# Altium PCB eye.PcbDoc
Units mm, origin at the board's own origin, x right, y up, seen from the top; angles counter-clockwise.
Board outline 25 x 25 mm, 2 copper layers (Top Layer, Bottom Layer), stack 0.871 mm thick; 11 components, 13 nets, 50 pads, 76 vias.
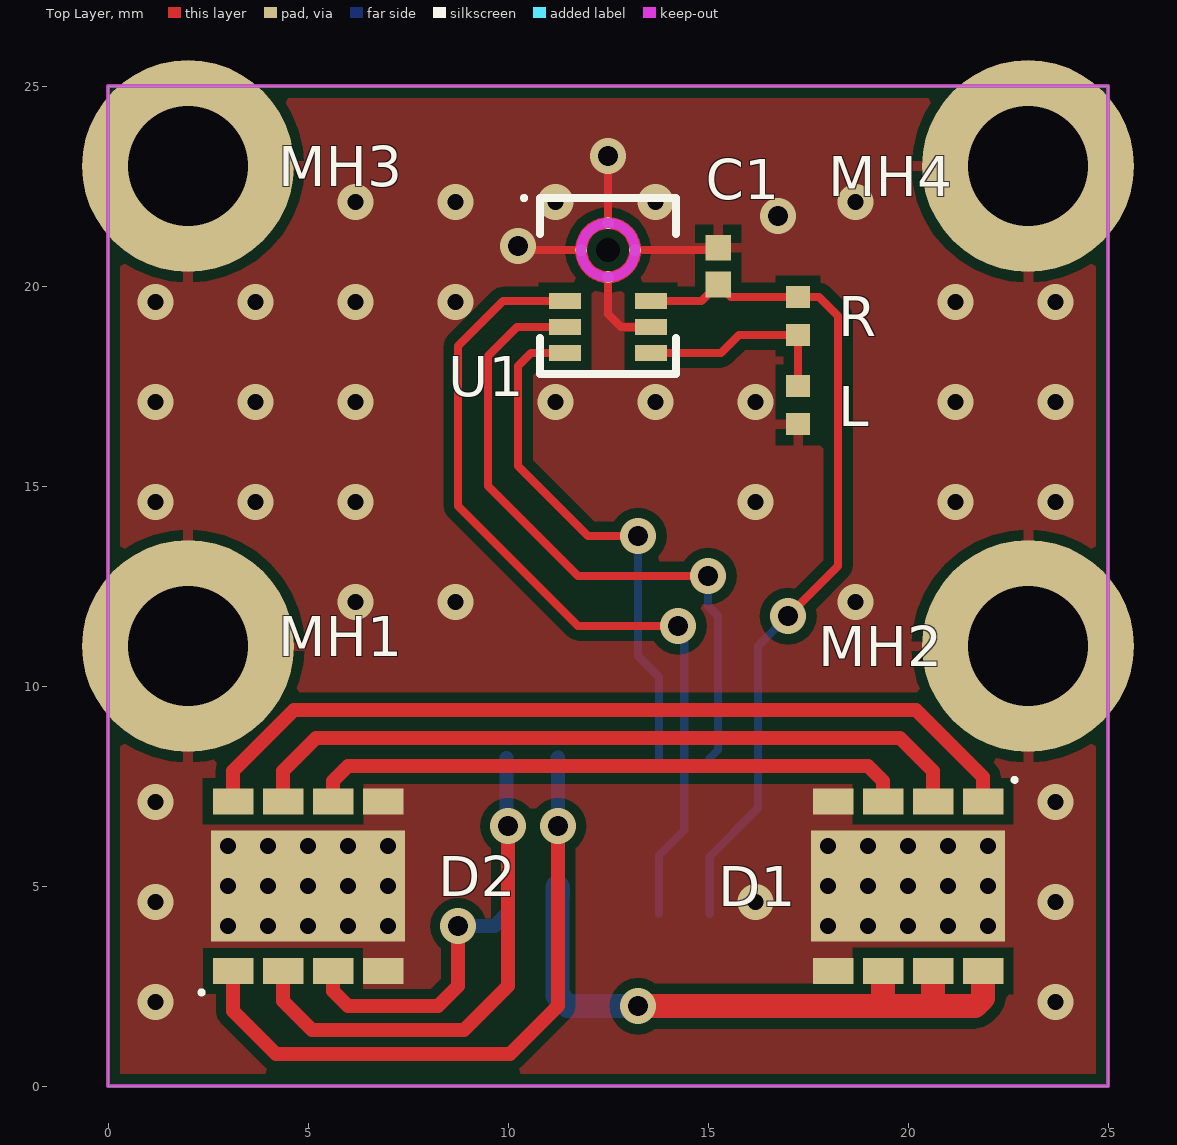
[diagram p0: Top Layer view]
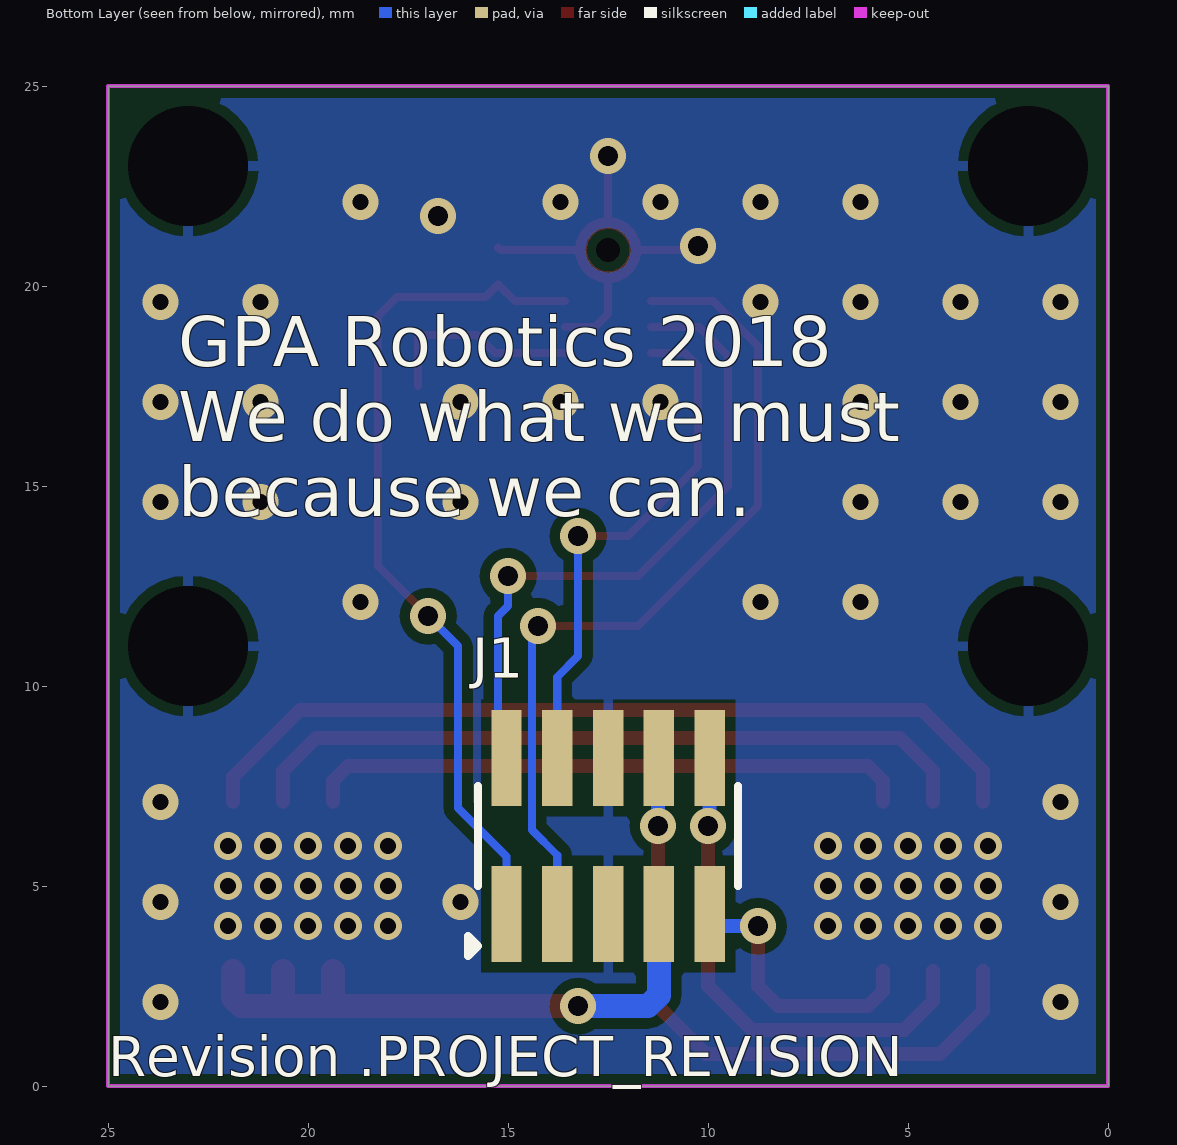
[diagram p1: Bottom Layer view, seen from below]
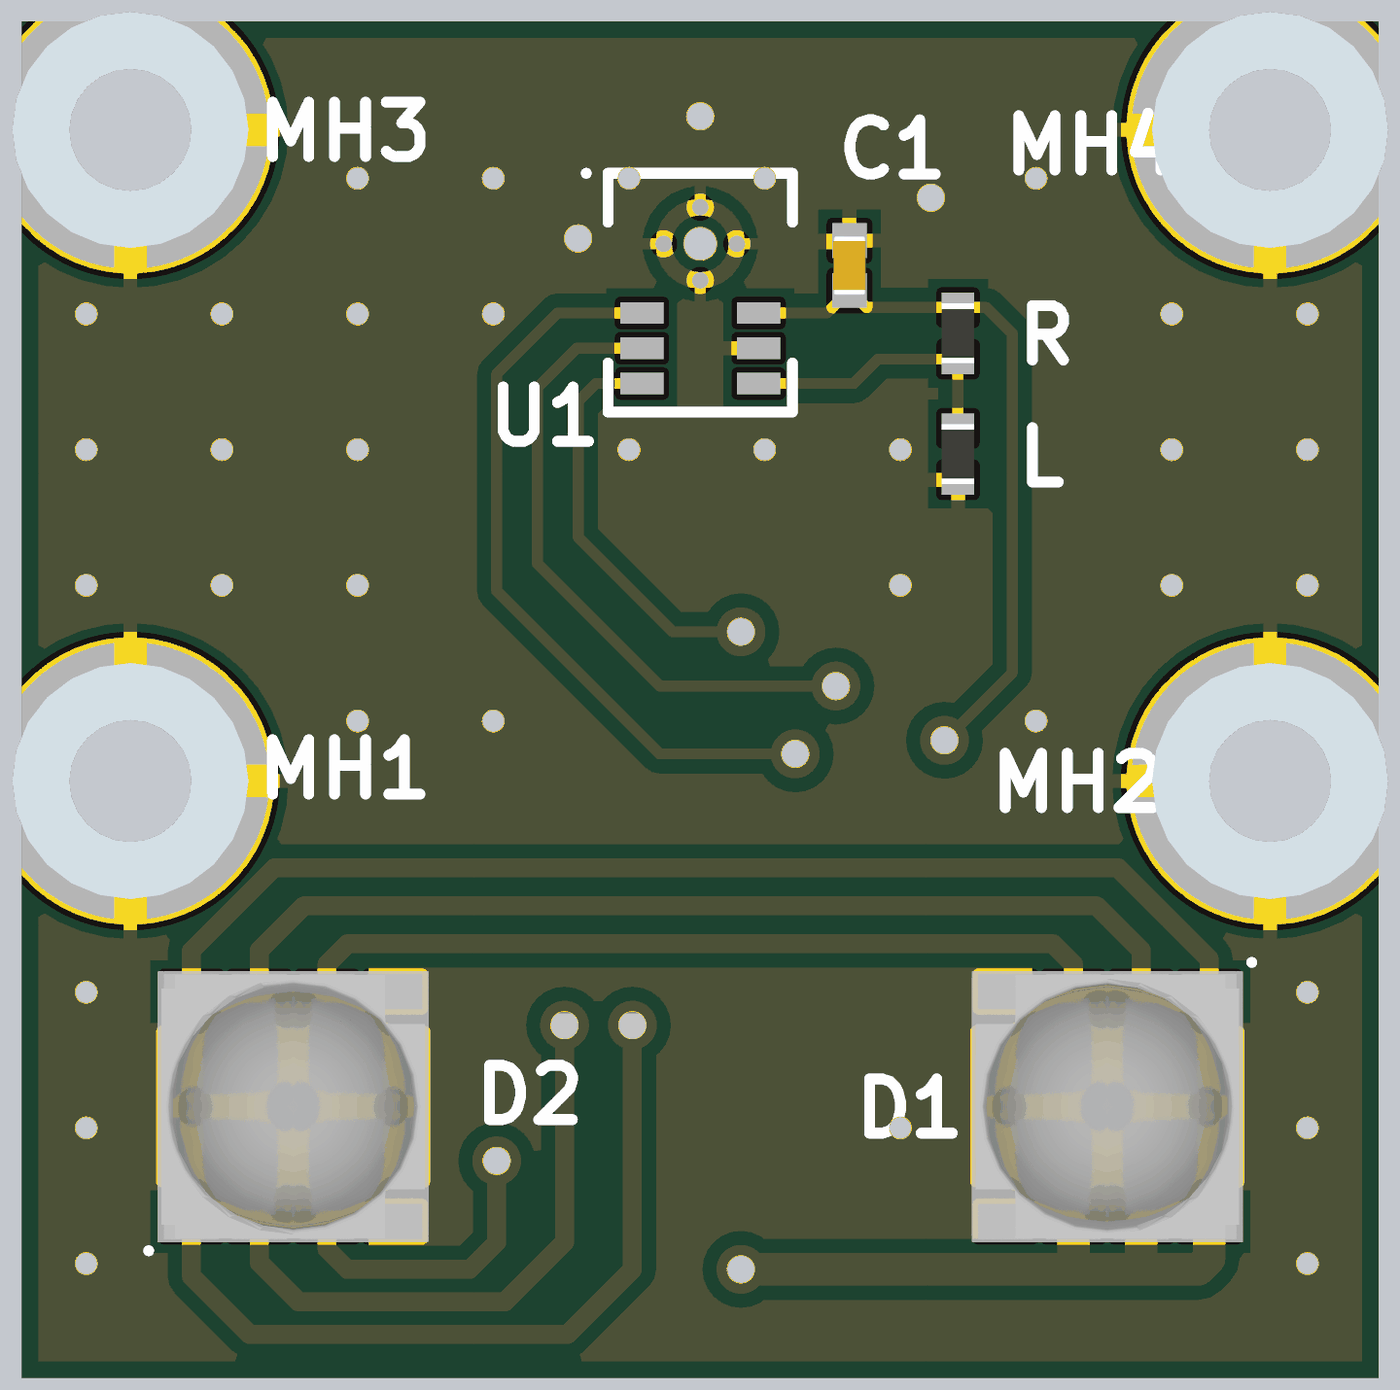
[diagram p2: 3D render of the assembled board from above, using the file's embedded part models]

## Layer stack, top to bottom
Top Solder: solder mask 0.0102, Solder Resist, Dk 3.5
Top Layer: signal copper 0.0356
Dielectric 1: dielectric 0.8, FR-4, Dk 4.8
Bottom Layer: signal copper 0.0356
Bottom Solder: solder mask 0.0102, Solder Resist, Dk 3.5

## Board outline
0,0 25,0 25,25 0,25

## Design rules (kind name [scope] priority, off if disabled: settings)
Clearance Clearance_2 [All vs InPolygon] p1: gap=0.254 ignorepadtopadclearanceinfootprint=FALSE
Clearance Clearance_1 [IsKeepOut vs InPolygon] p2: gap=0.358 ignorepadtopadclearanceinfootprint=FALSE
Clearance [All] p3: gap=0.152 ignorepadtopadclearanceinfootprint=FALSE
ComponentClearance [All] p1: gap=0.15 collisioncheckmode=3 verticalgap=0.1 showdistances=FALSE
PolygonConnect PolygonConnect_3 [All vs HasFootprint('PSON125P500X302_HS-9N')] p1: thpad.connectstyle=Relief thpad.reliefconductorwidth=0.254 thpad.reliefentries=4 thpad.polygonreliefangle="90 Angle" thpad.airgapwidth=0.254 smdpad.connectstyle=Direct smdpad.reliefconductorwidth=0.254 smdpad.reliefentries=4 smdpad.polygonreliefangle="90 Angle" smdpad.airgapwidth=0.254 via.connectstyle=Direct via.reliefconductorwidth=0.254 via.reliefentries=4 via.polygonreliefangle="90 Angle" via.airgapwidth=0.254
PolygonConnect PolygonConnect_2 [All vs HasFootprint('mount_m2l')] p2: connectstyle=Direct reliefconductorwidth=0.254 reliefentries=4 polygonreliefangle="90 Angle" airgapwidth=0.254
PolygonConnect PolygonConnect_1 [All vs InNet('GND')] p3: thpad.connectstyle=Relief thpad.reliefconductorwidth=0.254 thpad.reliefentries=4 thpad.polygonreliefangle="90 Angle" thpad.airgapwidth=0.254 smdpad.connectstyle=Relief smdpad.reliefconductorwidth=0.254 smdpad.reliefentries=4 smdpad.polygonreliefangle="90 Angle" smdpad.airgapwidth=0.254 via.connectstyle=Direct via.reliefconductorwidth=0.254 via.reliefentries=4 via.polygonreliefangle="90 Angle" via.airgapwidth=0.254
PolygonConnect [All] p4: connectstyle=Relief reliefconductorwidth=0.254 reliefentries=4 polygonreliefangle="90 Angle" airgapwidth=0.254
RoutingVias [All] p1: holewidth=0.5 width=0.9 viastyle="Through Hole" minholewidth=0.254 minwidth=0.508 maxholewidth=5 maxwidth=5
SolderMaskExpansion [All] p1: expansion=0.102
Width [All] p1: maxlimit=2 minlimit=0.152 preferedwidth=0.203
29 further rules are at their usual default settings.

## Components (designator, comment, footprint, x,y, rotation, side; value= is the part's Value field where it differs from the comment)
C1 "cap" CAPC1005X06N 15.25,20.5 r270 top value=100n
D1 "XMLCTW" PSON125P500X302_HS-9N 20,5 r270 top
D2 "XMLCTW" PSON125P500X302_HS-9N 5,5 r90 top
J1 "2x5" hdr_2x5_50mil 12.5,6.25 r180 bottom
L "res" RESC1005X04N 17.25,17.025 r90 top value=0R
MH1 "ID2.25x2.5mm" 9774025943 2,11 r0 top
MH2 "ID2.25x2.5mm" 9774025943 23,11 r0 top
MH3 "ID2.25x2.5mm" 9774025943 2,23 r0 top
MH4 "ID2.25x2.5mm" 9774025943 23,23 r0 top
R "res" RESC1005X04N 17.25,19.25 r90 top value=0R
U1 "ICS-43432" PSON65P300X110-6N 12.5,20 r0 top

## Footprints (in the part's own frame and the unit in brackets; to place one, negate y for a bottom-side part, rotate by r counter-clockwise, add the part's x,y. Pads: shape width x height; smd on the part's side, far side on the other; paste and mask are expansions set on the pad)
9774025943 [mm] "SMT Steel Spacer Internal hole diameter 2.25mm non stop, height 2.5mm"
  round 5.3 / inner round 0 / far side round 0 hole 3 unplated: 1(0,0)
  body extent -2.17,-2.17 2.18,2.17, height 2.5
CAPC1005X06N [mm] "Chip Capacitor, 2-Leads, Body 1.00x0.50mm, IPC Medium Density"
  rect 0.64x0.64 smd: 1(-0.46,0) 2(0.46,0)
  body extent -0.55,-0.3 0.55,0.3, height 0.6
hdr_2x5_50mil [mm] "2x5 Pin header, 50mil pitch"
  rect 0.76x2.4 smd: 1(-2.54,-1.95) 2(-2.54,1.95) 2(-2.54,1.95) 3(-1.27,-1.95) 4(-1.27,1.95) 5(0,-1.95) 6(0,1.95) 7(1.27,-1.95) 8(1.27,1.95) 9(2.54,-1.95) 10(2.54,1.95)
  silkscreen extent -3.5,-3 3.25,1.25, body extent -3.17,-2.75 3.18,2.75, height 4.5
PSON65P300X110-6N [mm] "PSON, 6-Leads, Body 4,00x3,00mm, Pitch 0,65mm, IPC Medium Density"
  rect 0.8x0.4 smd: 1(1.075,-1.675) 2(1.075,-1.025) 3(1.075,-0.375) 5(-1.075,-0.375) 6(-1.075,-1.025) 7(-1.075,-1.675)
  round 0.3 smd: 4(-0.675,0.9) 4(0,0.225) 4(0,1.575) 4(0.675,0.9)
  round 0 hole 0.6: PORT(0,0.9)
  Top Layer lines w0.3: -0.675,0.9 cw(c0,0.9) 0,1.575 cw(c0,0.9) 0.675,0.9 cw(c0,0.9) 0,0.225 cw(c0,0.9) -0.675,0.9
  silkscreen extent -2.15,-2.2 1.7,2.25, body extent -1.55,-2.05 1.55,2.05, height 1.1
PSON125P500X302_HS-9N [mm] "PSON, 8-Leads, Body 5,00x5,00mm, Pitch 1,25mm, Thermal Pad 4,85x2,79mm, IPC Medium Density"
  rect 2.78x4.85 smd paste-1.395: 9(0,0)
  rect 0.65x1.01 smd: BA(2.12,-0.625) BC(-2.12,-0.625) GA(2.12,0.625) GC(-2.12,0.625) RA(2.12,1.875) RC(-2.12,1.875) WA(2.12,-1.875) WC(-2.12,-1.875)
  silkscreen extent -2.71,2.61 -2.61,2.71, body extent -2.5,-2.5 2.5,2.5, height 3.01
RESC1005X04N [mm] "Chip Resistor, 2-Leads, Body 1.05x0.54mm, IPC Medium Density"
  rect 0.55x0.6 smd: 1(-0.475,0) 2(0.475,0)
  body extent -0.55,-0.3 0.55,0.3, height 0.4

## Part data
C1: "Capacitor"
D1 D2: library part xmlctw, Supplier Part Number 1=XMLCTW-A2-0000-00C2AAAB1CT-ND, Supplier 1=Digi-Key
J1: library part hdr_2x5, "2x5 Header", Supplier Part Number 1=SAM8796-ND, Supplier 1=Digi-Key
L R: "Resistor"
MH1 MH2 MH3 MH4: library part 9774025943R, "WA-SMST SMT Steel Spacer non stop, OD4.35mm, ID2.25x2.5mm", Operating Temperature="-55 to +150degC", ComponentLink1Description=Manufacturer, ComponentLink1URL=http://www.we-online.de, ComponentLink2Description=Datasheet, ComponentLink2URL=https://katalog.we-online.com/em/datasheet/9774025943R.pdf, Inner Diameter=2.25mm, Length=2.5mm, Material=Steel, Mounting Technology=SMT, Outer Diameter=4.35mm, Packaging="Tape and Reel", Part Number=9774025943R, Published Date="September 2019", Publisher="Wurth Elektronik", Surface=Tin
U1: library part ics-43432, Supplier Part Number 1=1428-1053-1-ND, Supplier 1=Digi-Key

## Via types
v1: diameter 0.9, hole 0.4, Top Layer to Bottom Layer, tented both sides, 35 vias
v2: diameter 0.7, hole 0.4, Top Layer to Bottom Layer, 30 vias
v3: diameter 0.9, hole 0.5, Top Layer to Bottom Layer, tented both sides, 11 vias

## Nets (pads, with @x,y where several pads share a name; then routed paths per layer and width w, separated by ;. In a path a pad name is that pad's centre, name@x,y a point inside that pad or via, vN(x,y) a via of type N, cw(c..) or ccw(c..) an arc to the next point about the centre after c; other vN are vias at no path point)
GND: C1.1 D1.9 D1.WA D1.WC D2.9 D2.WA D2.WC J1.5 J1.6 L.1 MH1.1 MH2.1 MH3.1 MH4.1 U1.2 U1.4 | length 7.5
  Top Layer w0.203: v3(10.25,21) 10.35,20.9 U1.4@11.825,20.9 ; U1.4@12.5,20.225 12.5,19.3 12.825,18.975 U1.2 ; U1.4@12.5,21.575 v3(12.5,23.25) ; U1.4@13.175,20.9 15.19,20.9 C1.1
  other v1: 1.187,2.107 23.687,2.107 1.187,4.607 16.187,4.607 23.687,4.607 1.187,7.107 23.687,7.107 6.187,12.107 8.687,12.107 18.687,12.107 1.187,14.607 3.687,14.607 6.187,14.607 16.187,14.607 21.187,14.607 23.687,14.607 1.187,17.107 3.687,17.107 6.187,17.107 11.187,17.107 13.687,17.107 16.187,17.107 21.187,17.107 23.687,17.107 1.187,19.607 3.687,19.607 6.187,19.607 8.687,19.607 21.187,19.607 23.687,19.607 6.187,22.107 8.687,22.107 11.187,22.107 13.687,22.107 18.687,22.107
  other v2: 3,4 4,4 5,4 6,4 7,4 18,4 19,4 20,4 21,4 22,4 3,5 4,5 5,5 6,5 7,5 18,5 19,5 20,5 21,5 22,5 3,6 4,6 5,6 6,6 7,6 18,6 19,6 20,6 21,6 22,6
  other v3: 16.75,21.75
LED_BLUE: D2.BC J1.9 | length 6.8
  Top Layer w0.35: D2.BC 5.625,2.375 6,2 8.25,2 8.75,2.5 v3(8.75,4)
  Bottom Layer w0.35: v3(8.75,4) 9.66,4 J1.9
LED_GREEN: D2.GC J1.10 | length 12.9
  Top Layer w0.35: D2.GC 4.375,2.125 5.1,1.4 8.9,1.4 10,2.5 v3(10,6.5)
  Bottom Layer w0.35: J1.10 9.96,6.54 v3(10,6.5)
LED_PWR: D1.BA D1.GA D1.RA J1.7 | length 16.3
  Top Layer w0.6: v3(13.25,2) 19.375,2 ; D1.BA 19.375,2 ; D1.GA 20.625,2.099 20.526,2 ; D1.RA 21.875,2.197 21.678,2 20.526,2 ; 19.375,2 20.526,2
  Bottom Layer w0.6: J1.7@11.25,4.75 11.25,4.96 11.23,4.98 J1.7 11.23,2.27 11.5,2 v3(13.25,2)
LED_RED: D2.RC J1.8 | length 16.3
  Top Layer w0.35: D2.RC 3.125,1.875 4.2,0.8 10.05,0.8 11.25,2 v3(11.25,6.5)
  Bottom Layer w0.35: J1.8 11.25,8.22 v3(11.25,6.5)
NetD1_BC: D1.BC D2.BA | length 15.1
  Top Layer w0.35: D2.BA 5.625,7.625 6,8 19,8 19.375,7.625 D1.BC
NetD1_GC: D1.GC D2.GA | length 18.4
  Top Layer w0.35: D2.GA 4.375,7.875 5.2,8.7 19.8,8.7 20.625,7.875 D1.GC
NetD1_RC: D1.RC D2.RA | length 21.4
  Top Layer w0.35: D2.RA 3.125,7.875 4.65,9.4 20.2,9.4 21.875,7.725 D1.RC
NetJ1_2: J1.2 U1.6 | length 16.6
  Top Layer w0.203: U1.6 10.225,18.975 9.5,18.25 9.5,15 11.75,12.75 v3(15,12.75)
  Bottom Layer w0.203: v3(15,12.75) 15,12 15.25,11.75 15.25,8.41 J1.2@15.04,8.2
NetJ1_3: J1.3 U1.5 | length 21.4
  Top Layer w0.203: U1.5 9.875,19.625 8.75,18.5 8.75,14.5 11.75,11.5 v3(14.25,11.5)
  Bottom Layer w0.203: J1.3 13.77,5.77 14.404,6.404 14.404,11.346 v3(14.25,11.5)
NetJ1_4: J1.4 U1.7 | length 13.3
  Top Layer w0.203: U1.7 10.575,18.325 10.25,18 10.25,15.5 12,13.75 v3(13.25,13.75)
  Bottom Layer w0.203: v3(13.25,13.75) 13.25,10.75 13.77,10.23 J1.4
NetL_2: L.2 R.1 U1.1 | length 5.1
  Top Layer w0.203: U1.1 15.325,18.325 15.775,18.775 R.1 L.2
VCC: C1.2 J1.1 R.2 U1.3 | length 21.5
  Top Layer w0.203: U1.3 14.835,19.625 C1.2 15.565,19.725 R.2 17.775,19.725 18.25,19.25 18.25,13 v3(17,11.75)
  Bottom Layer w0.203: J1.1 15.04,5.74 16.25,6.95 16.25,11 v3(17,11.75)
pads on no net: U1.PORT

## Polygon pours and split planes (outlines as drawn)
GND on Bottom Layer "Bottom Layer" (solid, remove dead copper, pour order 1): 0,0 25,0 25,25 0,25
GND on Top Layer "Top Layer" (solid, remove dead copper, pour order 0): 0,0 25,0 25,25 0,25

## Keep-outs
Top Layer:
  circle w0.254: c12.5,20.9 r0.675
Keep-Out Layer:
  the board outline again, w0.1

## Silkscreen, mask and mechanical layers (free items; w line width, h text height)
Bottom Overlay:
  text "GPA Robotics 2018 / We do what we must / because we can." at 23.25,14.25 h1.25
  text "Revision .PROJECT_REVISION" at 25,0.25 h1